# EAGLE board esquema_PIC_1 (EAGLE 5.06)
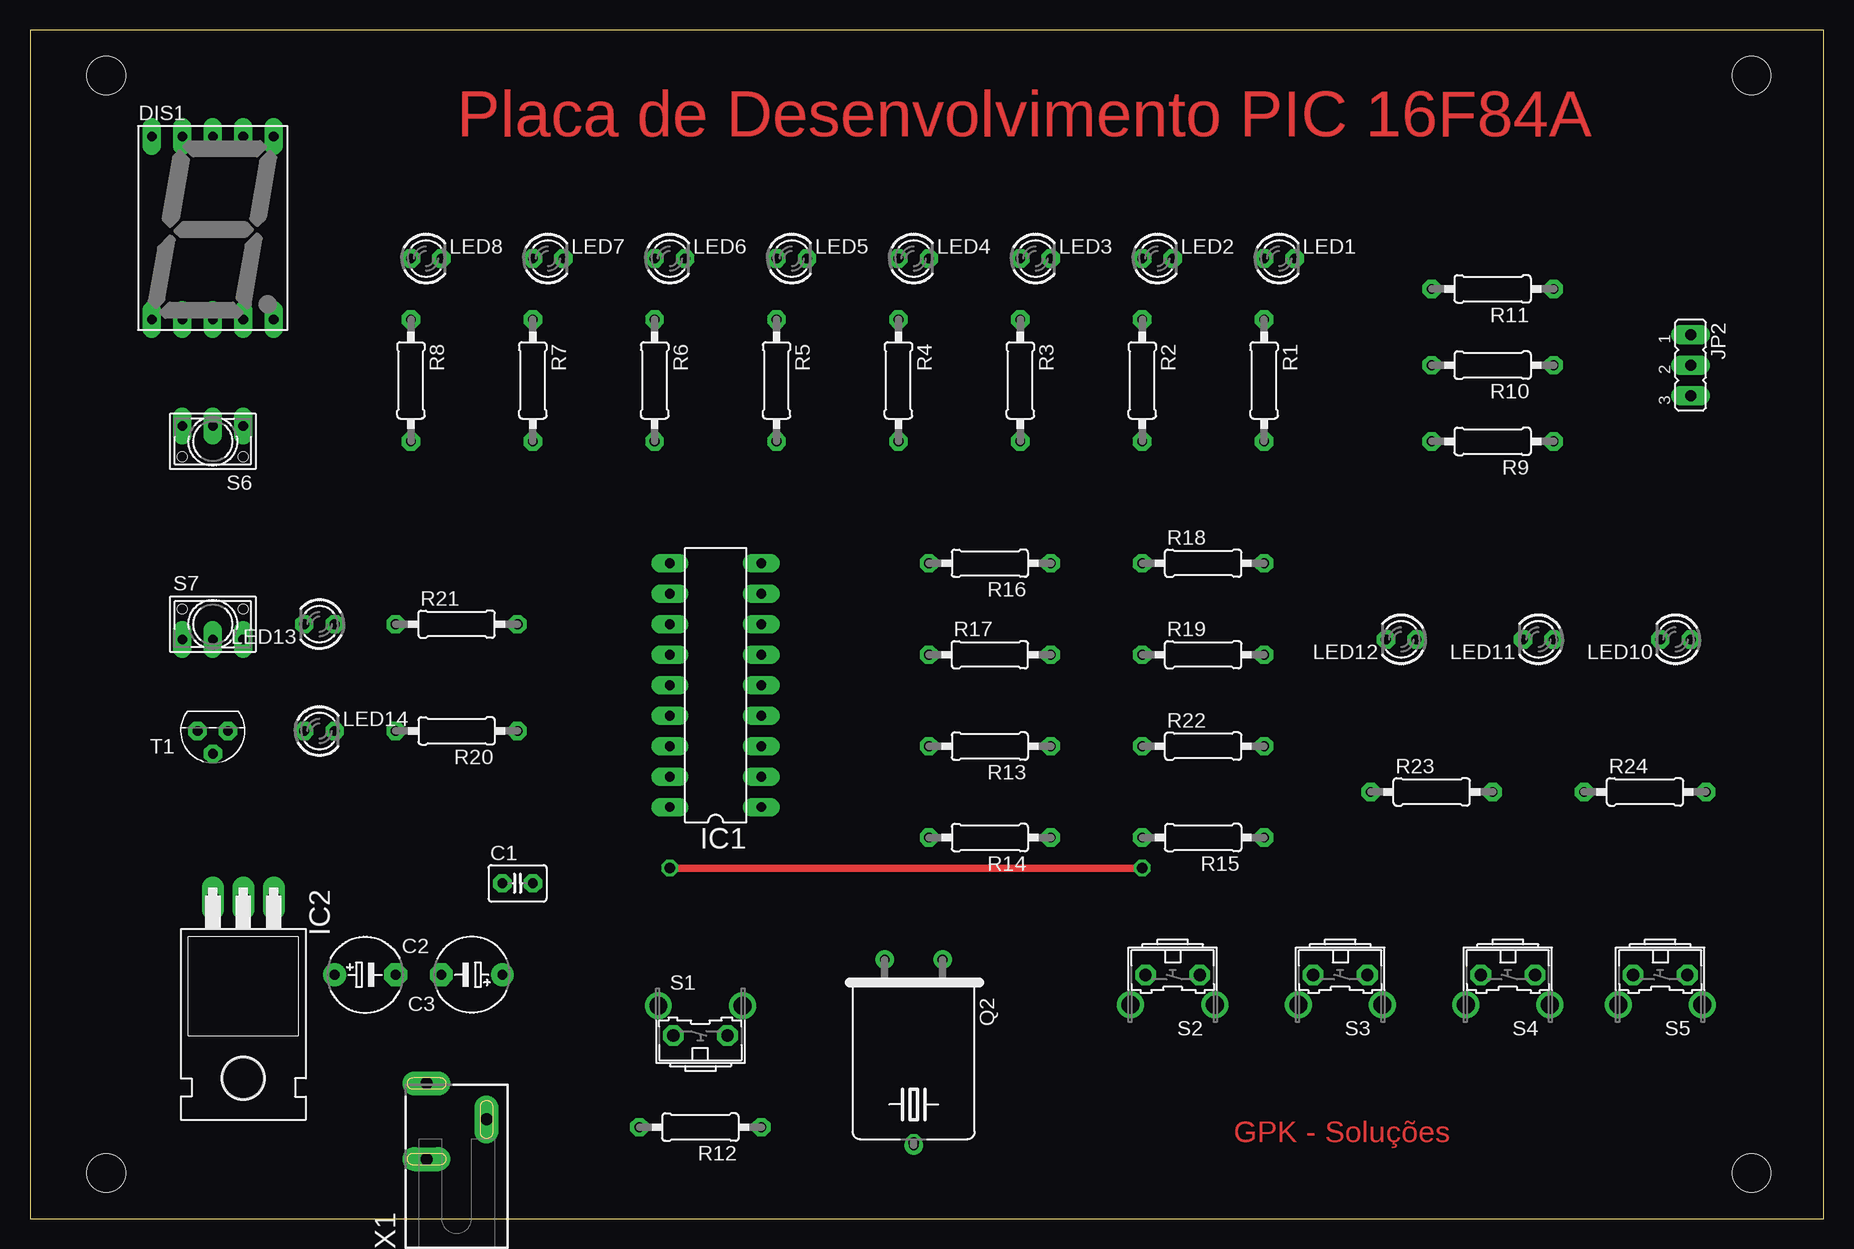
[diagram p0: board, top side]
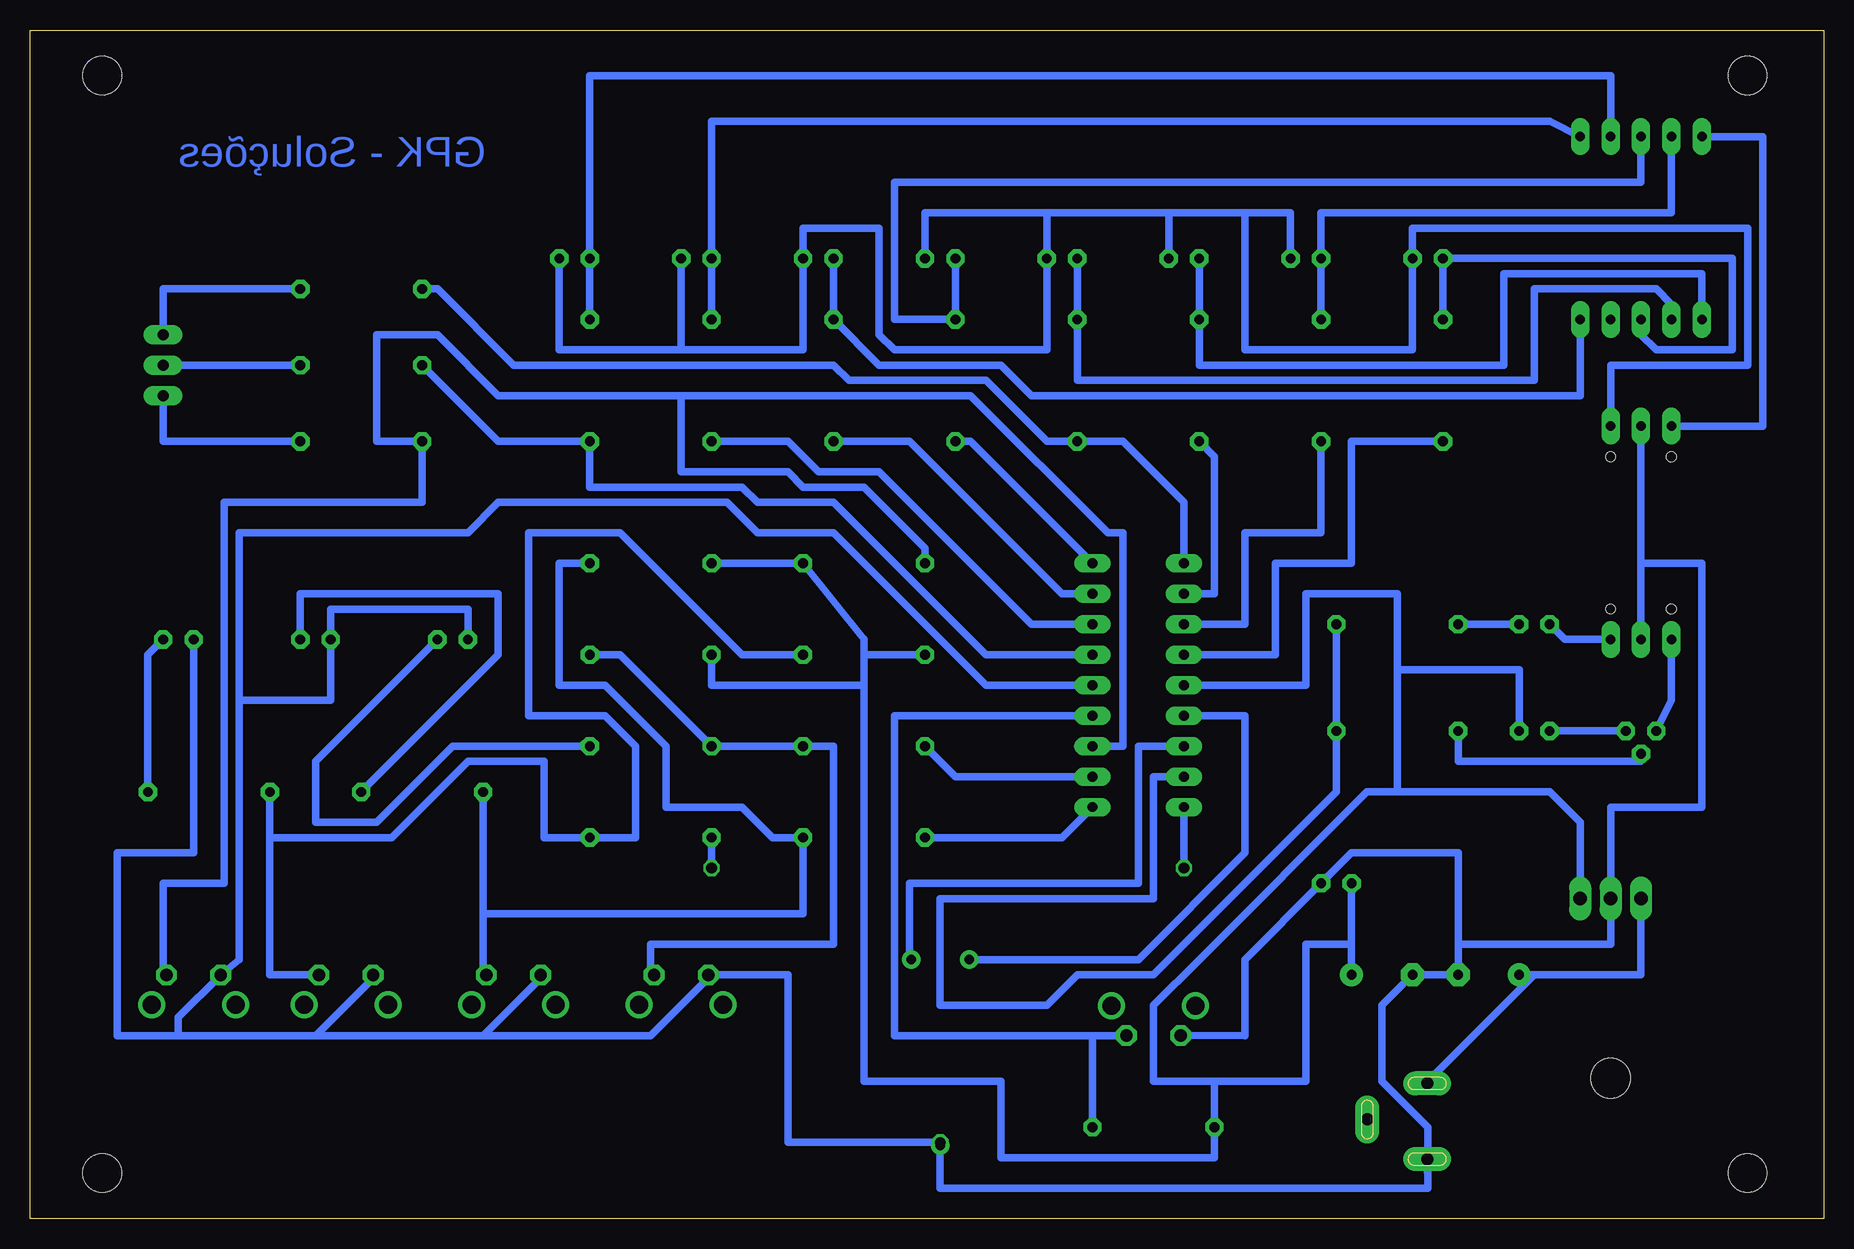
[diagram p1: board, bottom side, seen from below]

Size 149.53 x 99.05 mm. Coordinates in mm from the lower left corner, seen from the top.
Outline: 0,0 149.53,0 149.53,99.05 0,99.05 0,0
Copper layers (1*16): Top 0.035mm / dielectric 1.5mm / Bottom 0.035mm
Design rules "default *": minimum track width 25mil, minimum drill 24mil, track to track 8mil, track to pad 8mil, pad to pad 8mil, via to via 8mil, smd to smd 8mil, copper to edge 40mil, drill to drill 8mil, minimum pad ring 14mil, minimum via ring 8mil, stop-mask expansion 4mil, vias tented up to drill 0mil, thermal gap 10mil
Holes 3.2 mm at 6.35,3.81 143.51,95.25 143.51,3.81 6.35,95.25

## Footprints (pad centres in the part's own frame; a part is rotated, then mirrored left to right if it is on the bottom)
C025-030X050 = drill 0.813 octagon: 1 -1.27,0; 2 1.27,0
E5-6 = drill 0.813 pad 1.905 round: + -2.54,0 | drill 0.813 pad 1.905 octagon: - 2.54,0
HDSP-M = drill 0.813 long: 1 -5.08,-7.62; 2 -2.54,-7.62; 3 0,-7.62; 4 2.54,-7.62; 5 5.08,-7.62; 6 5.08,7.62; 7 2.54,7.62; 8 0,7.62; 9 -2.54,7.62; 10 -5.08,7.62
DIL18 = drill 0.813 long: 1 -10.16,-3.81; 2 -7.62,-3.81; 3 -5.08,-3.81; 4 -2.54,-3.81; 5 0,-3.81; 6 2.54,-3.81; 7 5.08,-3.81; 8 7.62,-3.81; 9 10.16,-3.81; 10 10.16,3.81; 11 7.62,3.81; 12 5.08,3.81; 13 2.54,3.81; 14 0,3.81; 15 -2.54,3.81; 16 -5.08,3.81; 17 -7.62,3.81; 18 -10.16,3.81
TO220H = drill 1.118 long: 1 -2.54,-10.16; 2 0,-10.16; 3 2.54,-10.16 | hole 3.302: 0,4.826
JP2 = drill 0.914 long: 1 -2.54,0; 2 0,0; 3 2.54,0
LED3MM = drill 0.813 octagon: A -1.27,0; K 1.27,0
HC49TL-H = drill 0.813 round: 1 -2.413,-7.62; 2 2.413,-7.62; 3 0,7.874
0207/10 = drill 0.813 octagon: 1 -5.08,0; 2 5.08,0
B3F-31XX = drill 1.016 octagon: 1 -2.261,-1.245; 2 2.261,-1.245 | drill 1.499 pad 2.159 round: 3 -3.505,1.245; 4 3.505,1.245
9450-1 = drill 0.813 long: 1 -2.54,-1.27; 2 0,-1.27; 3 2.54,-1.27 | hole 0.813: 2.54,1.27; -2.54,1.27
TO92 = drill 0.813 octagon: 1 1.27,0; 2 0,1.905; 3 -1.27,0
SCD-014-A = drill 1 pad 2 long: 1 -2.5,13.8; 2 -2.5,7.5; 3 2.5,10.8

## Placement (x,y rotation side)
C1  [C025-030X050]  40.64,27.94 0 top
C2  [E5-6]  27.94,20.32 0 top
C3  [E5-6]  36.83,20.32 180 top
DIS1  HD-H101  [HDSP-M]  15.24,82.55 0 top
IC1  PIC16F84AP  [DIL18]  57.15,44.45 90 top
IC2  7805T  [TO220H]  17.78,16.51 180 top
JP2  [JP2]  138.43,71.12 270 top
LED1  [LED3MM]  104.14,80.01 0 top
LED2  [LED3MM]  93.98,80.01 0 top
LED3  [LED3MM]  83.82,80.01 0 top
LED4  [LED3MM]  73.66,80.01 0 top
LED5  [LED3MM]  63.5,80.01 0 top
LED6  [LED3MM]  53.34,80.01 0 top
LED7  [LED3MM]  43.18,80.01 0 top
LED8  [LED3MM]  33.02,80.01 0 top
LED10  [LED3MM]  137.16,48.26 180 top
LED11  [LED3MM]  125.73,48.26 180 top
LED12  [LED3MM]  114.3,48.26 180 top
LED13  [LED3MM]  24.13,49.53 180 top
LED14  [LED3MM]  24.13,40.64 0 top
Q2  [HC49TL-H]  73.66,13.97 180 top
R1  [0207/10]  102.87,69.85 270 top
R2  [0207/10]  92.71,69.85 270 top
R3  [0207/10]  82.55,69.85 270 top
R4  [0207/10]  72.39,69.85 270 top
R5  [0207/10]  62.23,69.85 270 top
R6  [0207/10]  52.07,69.85 270 top
R7  [0207/10]  41.91,69.85 270 top
R8  [0207/10]  31.75,69.85 270 top
R9  [0207/10]  121.92,64.77 180 top
R10  [0207/10]  121.92,71.12 180 top
R11  [0207/10]  121.92,77.47 180 top
R12  [0207/10]  55.88,7.62 180 top
R13  [0207/10]  80.01,39.37 180 top
R14  [0207/10]  80.01,31.75 180 top
R15  [0207/10]  97.79,31.75 180 top
R16  [0207/10]  80.01,54.61 180 top
R17  [0207/10]  80.01,46.99 0 top
R18  [0207/10]  97.79,54.61 0 top
R19  [0207/10]  97.79,46.99 0 top
R20  [0207/10]  35.56,40.64 180 top
R21  [0207/10]  35.56,49.53 0 top
R22  [0207/10]  97.79,39.37 0 top
R23  [0207/10]  116.84,35.56 0 top
R24  [0207/10]  134.62,35.56 0 top
S1  [B3F-31XX]  55.88,16.51 0 top
S2  [B3F-31XX]  95.25,19.05 180 top
S3  [B3F-31XX]  109.22,19.05 180 top
S4  [B3F-31XX]  123.19,19.05 180 top
S5  [B3F-31XX]  135.89,19.05 180 top
S6  9450-1  [9450-1]  15.24,64.77 180 top
S7  9450-1  [9450-1]  15.24,49.53 0 top
T1  BC337  [TO92]  15.24,40.64 180 top
X1  [SCD-014-A]  35.56,-2.54 0 top

## Library data of the parts
C1 R13-R20 R22-R24 = rcl
C2 C3 R1-R12 R21 = resistor
DIS1 = display-hp
IC1 = microchip
IC2 = linear
JP2 = jumper
LED1-LED8 LED10-LED14 = led
Q2 = crystal
S1-S5 = switch-omron
S6 S7 = switch-misc
T1 = transistor
X1 = con-shiua-chyuan

## Nets
+5V: C1.1 C3.+ IC1.14 IC2.1 LED14.K R12.2 R16.1 R17.1 R18.1 R19.1
GND: C1.2 C2.- C3.- IC1.5 IC2.2 LED10.K LED11.K LED12.K Q2.3 S1.1 S2.2 S3.2 S4.2 S5.2 S6.2 S7.2 X1.2
N$1: LED1.K LED2.K LED3.K LED4.K LED5.K LED6.K LED7.K LED8.K S6.1
N$2: DIS1.3 LED8.A R8.1
N$4: DIS1.1 LED6.A R6.1
N$5: DIS1.2 LED5.A R5.1
N$6: DIS1.8 LED4.A R4.1
N$7: DIS1.10 S6.3
N$8: DIS1.6 LED2.A R2.1
N$9: DIS1.7 LED1.A R1.1
N$10: IC1.13 R8.2
N$11: IC1.12 R7.2
N$12: IC1.11 R6.2
N$13: IC1.10 R5.2 R11.2
N$14: IC1.9 R4.2
N$15: IC1.8 R3.2
N$16: IC1.7 R2.2
N$17: IC1.6 R1.2 R10.2
N$18: DIS1.5 LED3.A R3.1
N$19: IC1.4 R12.1 S1.2
N$20: IC1.3 R9.2 R16.2 S5.1
N$21: IC1.18 R15.2
N$22: IC1.1 R14.2
N$23: IC1.2 R13.2
N$24: R15.1 R17.2 R24.1 S4.1
N$25: R14.1 R18.2 R23.1 S3.1
N$26: R13.1 R19.2 R22.1 S2.1
N$27: IC1.16 Q2.1
N$28: IC1.15 Q2.2
N$29: IC1.17 R20.1 R21.2
N$30: R20.2 T1.2
N$31: LED10.A R24.2
N$32: LED11.A R23.2
N$33: LED12.A R22.2
N$34: JP2.1 R11.1
N$35: JP2.2 R10.1
N$36: JP2.3 R9.1
N$37: LED13.K S7.3
N$38: S7.1 T1.1
N$39: LED14.A T1.3
N$40: LED13.A R21.1
N$41: C2.+ IC2.3 X1.1
N$42: DIS1.9 LED7.A R7.1

## Tracks (layer width: path | path; a pad name or v marks a point on that pad's centre or on a via)
+5V
  Bottom 0.61: 35.56,35.56 35.56,45.72 35.56,52.07 | IC2.1 20.32,33.02 22.86,35.56 35.56,35.56 | 35.56,35.56 38.1,35.56 52.07,21.59 | 68.58,5.08 68.58,11.43 80.01,11.43 80.01,15.24 | 39.37,22.86 43.18,22.86 43.18,11.43 50.8,11.43
  Bottom 0.635: R18.1 R16.1 80.01,48.26 80.01,46.99 | C3.+ 39.37,22.86 C1.1 | LED14.K 25.4,45.72 35.56,45.72 | IC1.14 43.18,44.45 43.18,52.07 35.56,52.07 | 80.01,46.99 R17.1 | R19.1 92.71,44.45 80.01,44.45 | 80.01,44.45 80.01,46.99 | 50.8,11.43 R12.2 | 80.01,15.24 80.01,44.45 | 68.58,5.08 50.8,5.08 50.8,11.43 | 52.07,21.59 55.88,17.78 55.88,11.43 50.8,11.43
GND  (via drill 0.9)
  Top 0.635: v73.66,6.35 Q2.3
  Bottom 0.61: 15.24,54.61 S7.2 | 10.16,34.29 17.78,34.29 IC2.2 | 96.52,59.69 92.71,59.69 | 97.79,59.69 92.71,59.69 | 132.08,44.45 132.08,57.15 113.03,57.15 110.49,59.69 101.6,59.69 | LED11.K 124.46,43.18 132.08,43.18 | 132.08,21.59 133.63,20.32 S5.2 137.16,16.76 137.16,15.24 | IC1.5 69.85,44.45 82.55,57.15 88.9,57.15 91.44,59.69 92.71,59.69
  Bottom 0.635: S1.1 48.26,15.24 48.26,21.59 C1.2 39.37,30.48 30.48,30.48 30.48,22.86 | S6.2 15.24,54.61 10.16,54.61 10.16,34.29 | 30.48,22.86 17.78,22.86 IC2.2 17.78,27.94 | 33.02,2.54 33.02,7.62 36.83,11.43 36.83,17.78 C3.- C2.- 30.48,22.86 | 92.71,20.32 86.36,20.32 86.36,6.35 v73.66,6.35 73.66,2.54 33.02,2.54 | LED12.K 113.03,50.8 124.46,50.8 LED11.K | 101.6,59.69 97.79,59.69 96.52,59.69 | 132.08,44.45 132.08,43.18 132.08,21.59 | LED10.K 135.89,30.48 142.24,30.48 142.24,15.24 137.16,15.24 125.73,15.24 | S5.2 133.35,20.32 | 111.76,15.24 106.68,20.32 S3.2 | 111.76,15.24 125.73,15.24 | 125.73,15.24 120.65,20.32 S4.2 | 92.71,20.32 97.79,15.24 111.76,15.24 | 92.71,20.32 S2.2 | X1.2 33.02,2.54
N$1
  Bottom 0.61: 48.26,83.82 48.26,72.39 34.29,72.39 LED8.K | 87.63,72.39 85.09,72.39 LED3.K 85.09,82.55 78.74,82.55 78.74,73.66 77.47,72.39 64.77,72.39 LED5.K
  Bottom 0.635: S6.1 17.78,71.12 6.35,71.12 6.35,82.55 34.29,82.55 LED8.K | 95.25,72.39 LED2.K | LED1.K 105.41,72.39 95.25,72.39 | 87.63,72.39 95.25,72.39 | LED7.K 44.45,83.82 48.26,83.82 54.61,83.82 | 54.61,83.82 LED6.K | 64.77,83.82 LED5.K | 54.61,83.82 64.77,83.82 | LED4.K 74.93,83.82 64.77,83.82
N$2
  Bottom 0.635: DIS1.3 15.24,73.66 13.97,72.39 7.62,72.39 7.62,80.01 LED8.A R8.1
N$4
  Bottom 0.635: DIS1.1 10.16,78.74 26.67,78.74 26.67,71.12 52.07,71.12 R6.1 LED6.A
N$5
  Bottom 0.635: DIS1.2 12.7,76.2 13.97,77.47 24.13,77.47 24.13,69.85 62.23,69.85 R5.1 LED5.A
N$6
  Bottom 0.635: LED4.A R4.1 77.47,74.93 77.47,86.36 15.24,86.36 DIS1.8
N$7
  Bottom 0.61: DIS1.10 5.08,90.17 5.08,66.04 S6.3
N$8
  Bottom 0.635: R2.1 LED2.A 92.71,91.44 22.86,91.44 DIS1.6
N$9
  Bottom 0.635: R1.1 LED1.A 102.87,95.25 17.78,95.25 DIS1.7
N$10
  Bottom 0.61: IC1.13 45.72,46.99 45.72,54.61 39.37,54.61 39.37,64.77
  Bottom 0.635: 39.37,64.77 R8.2
N$11
  Bottom 0.61: IC1.12 48.26,49.53 48.26,57.15 41.91,57.15 R7.2
N$12
  Bottom 0.635: IC1.11 50.8,52.07 50.8,63.5 R6.2
N$13
  Bottom 0.61: R11.2 115.57,77.47 109.22,71.12 82.55,71.12 81.28,69.85 69.85,69.85 64.77,64.77 R5.2 58.42,64.77 53.34,59.69 IC1.10
N$14
  Bottom 0.61: IC1.9 71.12,64.77 R4.2
N$15
  Bottom 0.61: IC1.8 63.5,52.07 76.2,64.77 R3.2
N$16
  Bottom 0.61: IC1.7 66.04,49.53 78.74,62.23 83.82,62.23 86.36,64.77 R2.2
N$17
  Bottom 0.61: R1.2 102.87,60.96 90.17,60.96 88.9,59.69 82.55,59.69 69.85,46.99 IC1.6
  Bottom 0.635: R10.2 110.49,64.77 R1.2
N$18
  Bottom 0.61: 60.96,68.58 66.04,68.58 68.58,71.12 78.74,71.12 R3.1
  Bottom 0.635: DIS1.5 20.32,68.58 60.96,68.58 | R3.1 LED3.A
N$19
  Bottom 0.61: R12.1 60.96,15.24
  Bottom 0.635: S1.2 58.42,15.24 60.96,15.24 77.47,15.24 77.47,41.91 IC1.4
N$20
  Bottom 0.61: 101.6,68.58 110.49,68.58 115.57,73.66 | 116.84,59.69 133.35,59.69 133.35,27.94 | 58.42,57.15 59.69,57.15 71.12,68.58 | R16.2 74.93,55.88 80.01,60.96 85.09,60.96 86.36,62.23
  Bottom 0.635: 62.23,39.37 IC1.3 58.42,39.37 58.42,57.15 | 71.12,68.58 95.25,68.58 | 95.25,68.58 95.25,62.23 86.36,62.23 | 116.84,59.69 R9.2 120.65,64.77 120.65,73.66 115.57,73.66 | 133.35,27.94 138.43,27.94 138.43,20.32 S5.1 | 95.25,68.58 101.6,68.58
N$21  (via drill 0.9)
  Top 0.61: v53.34,29.21 v92.71,29.21
  Bottom 0.61: v92.71,29.21 R15.2 | v53.34,29.21 IC1.18
N$22
  Bottom 0.635: R14.2 63.5,31.75 IC1.1
N$23
  Bottom 0.635: IC1.2 72.39,36.83 R13.2
N$24
  Bottom 0.61: 113.03,38.1 106.68,38.1 106.68,31.75 R15.1 99.06,31.75 99.06,39.37 101.6,41.91 107.95,41.91 107.95,57.15
  Bottom 0.635: 129.54,31.75 129.54,20.32 125.73,20.32 S4.1 | 129.54,31.75 R24.1 | R17.2 90.17,46.99 100.33,57.15 107.95,57.15 | 129.54,31.75 119.38,31.75 113.03,38.1
N$25
  Bottom 0.61: 85.09,25.4 R14.1 87.63,31.75 90.17,34.29 96.52,34.29 96.52,39.37 101.6,44.45 105.41,44.45 105.41,54.61
  Bottom 0.635: 85.09,25.4 111.76,25.4 | 111.76,25.4 R23.1 | 105.41,54.61 R18.2 | 111.76,25.4 111.76,20.32 S3.1
N$26
  Bottom 0.635: R19.2 100.33,46.99 R22.1 R13.1 82.55,39.37 82.55,22.86 97.79,22.86 97.79,20.32 S2.1
N$27
  Bottom 0.61: Q2.1 76.2,21.72 76.2,27.94 57.15,27.94 57.15,39.37 IC1.16
N$28
  Bottom 0.61: Q2.2 57.15,21.59 48.26,30.48 48.26,41.91 IC1.15
N$29
  Bottom 0.61: R20.1 40.64,35.56 55.88,20.32 62.23,20.32 64.77,17.78 73.66,17.78
  Bottom 0.635: R20.1 R21.2 | IC1.17 55.88,36.83 55.88,26.67 73.66,26.67 73.66,17.78
N$30
  Bottom 0.635: R20.2 30.48,38.1 15.24,38.1 T1.2
N$31
  Bottom 0.635: LED10.A 139.7,46.99 R24.2
N$32
  Bottom 0.635: R23.2 110.49,46.99 110.49,52.07 127,52.07 LED11.A
N$33
  Bottom 0.635: R22.2 114.3,39.37 120.65,33.02 125.73,33.02 125.73,38.1 LED12.A
N$34
  Bottom 0.635: R11.1 138.43,77.47 JP2.1
N$35
  Bottom 0.635: R10.1 JP2.2
N$36
  Bottom 0.635: R9.1 138.43,64.77 JP2.3
N$37
  Bottom 0.635: S7.3 21.59,48.26 LED13.K
N$38
  Bottom 0.635: T1.1 12.7,43.18 S7.1
N$39
  Bottom 0.635: T1.3 LED14.A
N$40
  Bottom 0.635: LED13.A R21.1
N$41
  Bottom 0.635: IC2.3 15.24,20.32 24.13,20.32 | 24.13,20.32 C2.+ | 24.13,20.32 33.02,11.43 X1.1
N$42
  Bottom 0.635: R7.1 LED7.A 41.91,83.82 12.7,83.82 DIS1.9

## Text on the board
Top: Placa de Desenvolvimento PIC 16F84A | GPK - Soluções
Bottom: GPK - Soluções